# Altium PCB OSHparkTemplate.PcbDoc
Units mm, origin at the board's own origin, x right, y up, seen from the top; angles counter-clockwise.
Board outline 37 x 50 mm, 2 copper layers (Top Layer, Bottom Layer); 30 components, 26 nets, 143 pads, 8 vias.
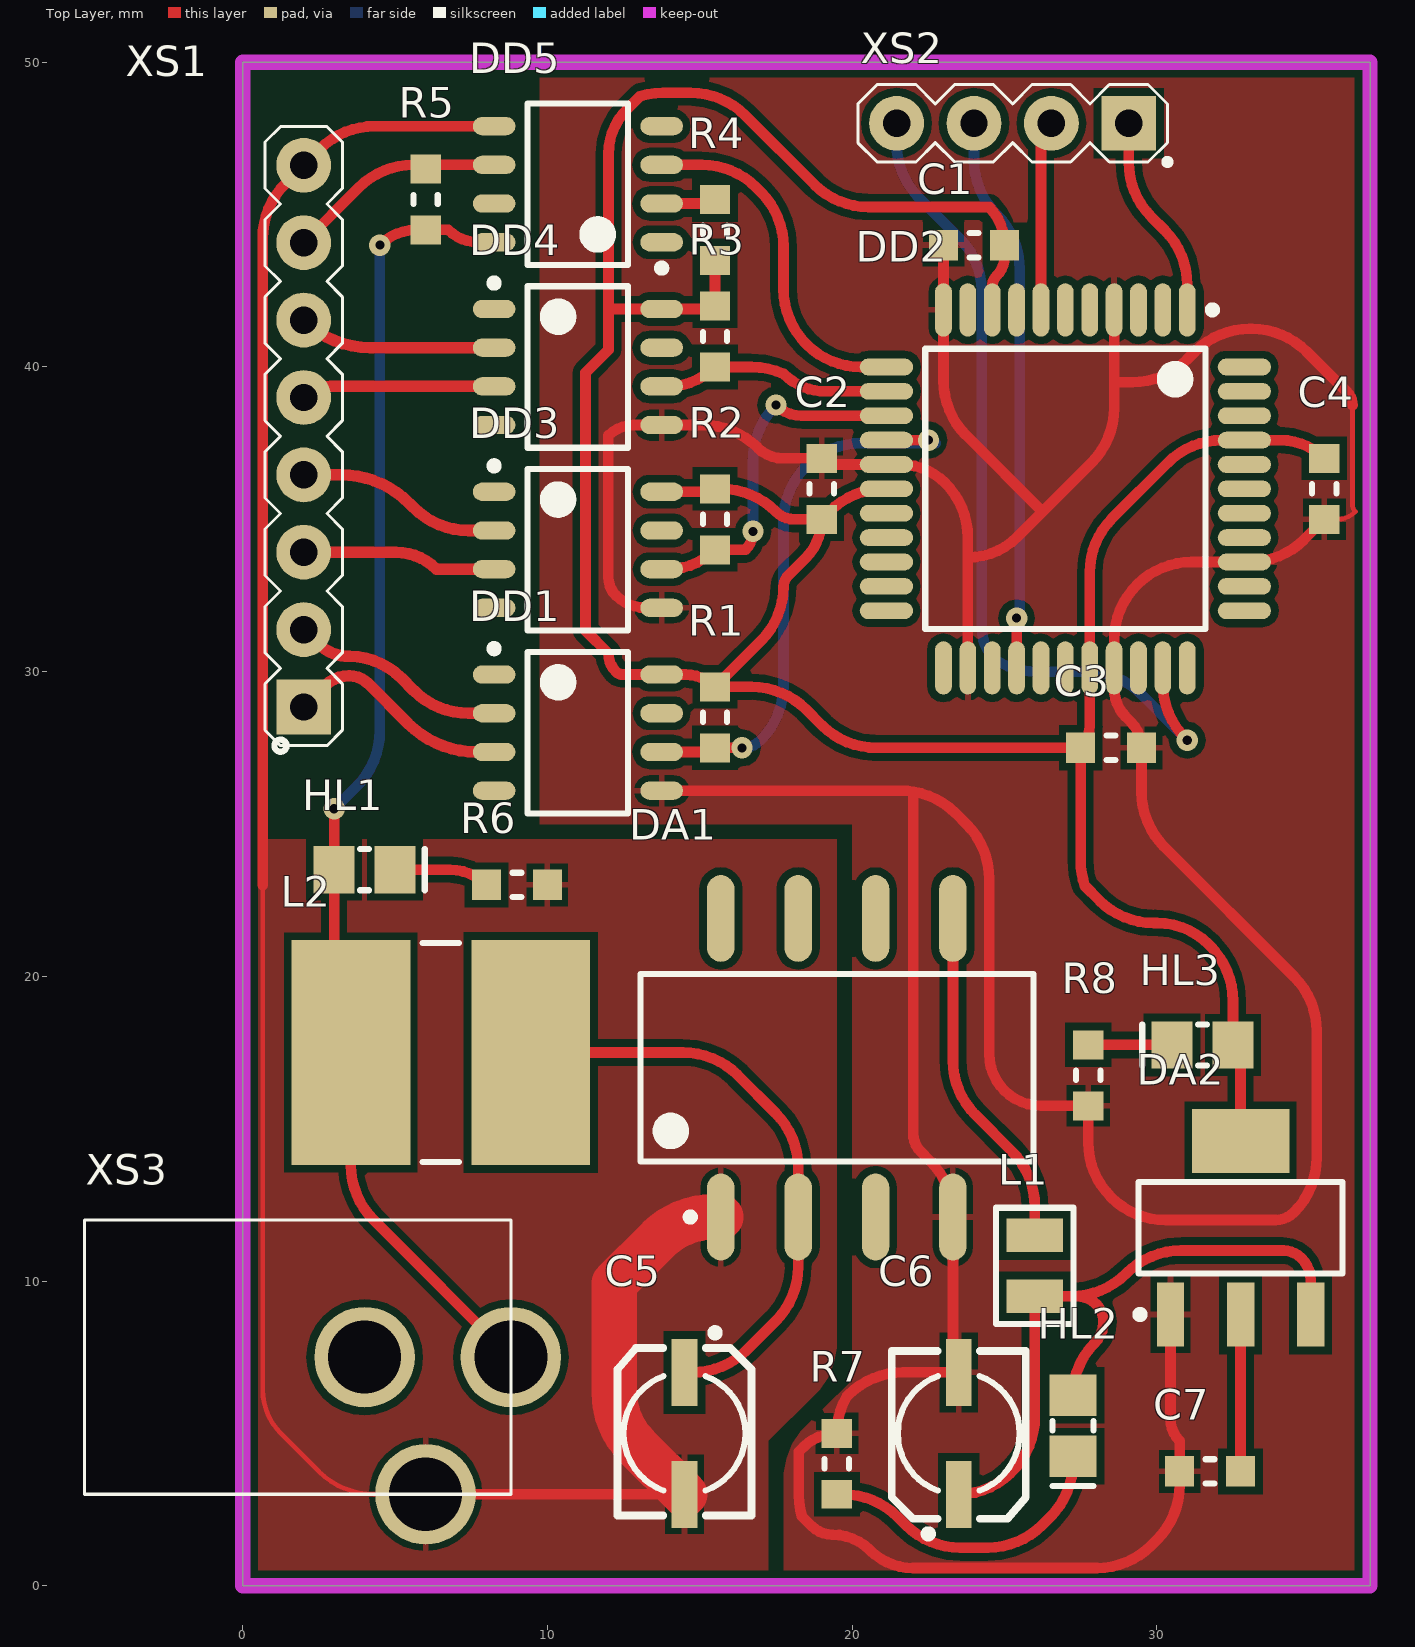
[diagram p0: Top Layer view]
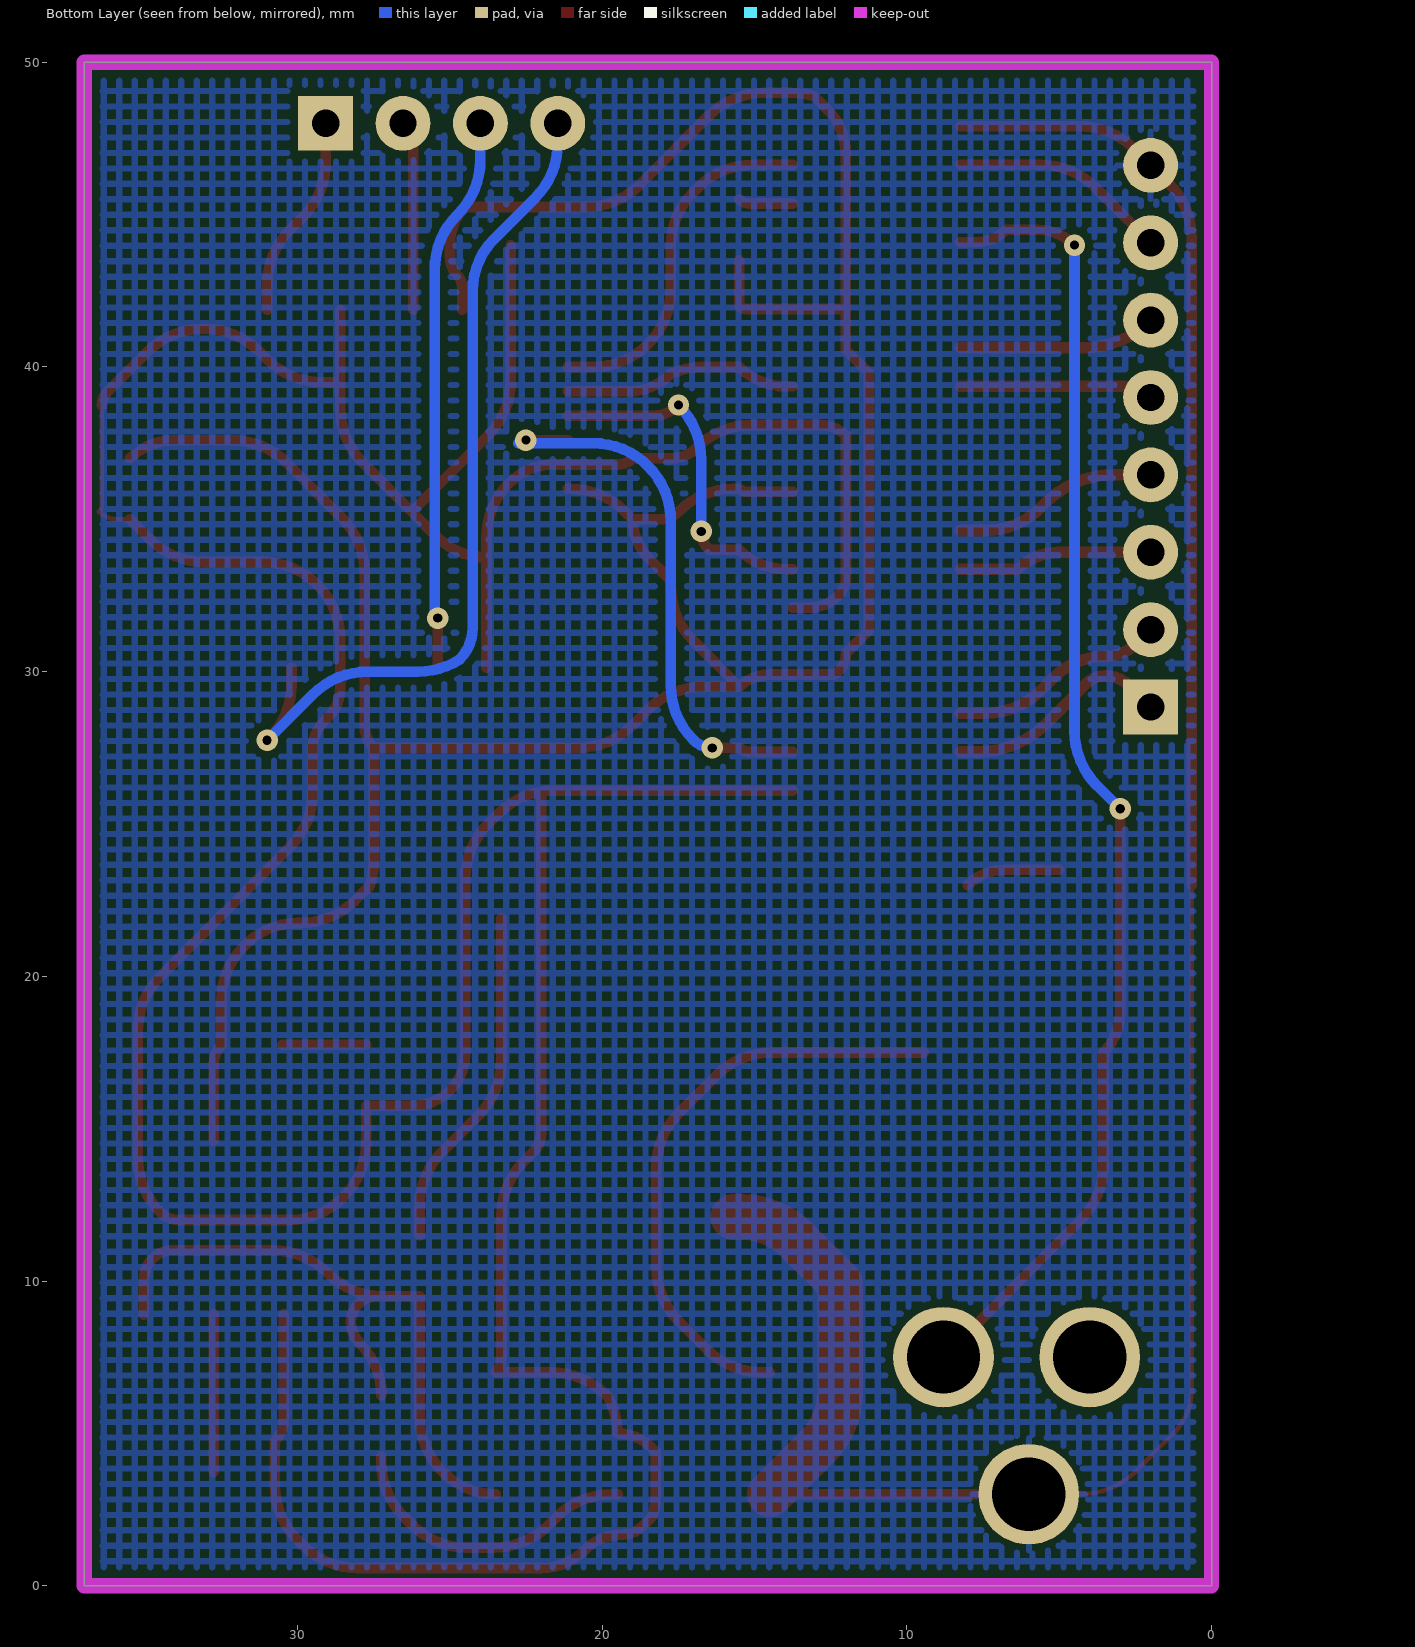
[diagram p1: Bottom Layer view, seen from below]

## Layer stack, top to bottom
Top Solder: solder mask 0.0102, Solder Resist, Dk 3.5
Top Layer: signal copper 0.0356
Dielectric 1: dielectric 0.32, FR-4, Dk 4.8
Bottom Layer: signal copper 0.0356
Bottom Solder: solder mask 0.0102, Solder Resist, Dk 3.5

## Board outline
0,0 0,50 37,50 37,0

## Design rules (kind name [scope] priority, off if disabled: settings)
AcuteAngle [All] p1: minimum=6.00000000000000E+0001 checktracksonly=FALSE
Clearance [All] p1: gap=0.25 ignorepadtopadclearanceinfootprint=FALSE except(0: Arc-Hole Track-Hole SMDPad-Hole THPad-Hole Via-Hole Fill-Hole Poly-Hole Region-Hole Text-Hole; 0.152: Arc-Arc Arc-Track Track-Track)
DiffPairsRouting [All] p1: maxlimit=0.254 minlimit=0.254 mostfreqgap=0.254 toplayer_minwidth=0.381 toplayer_maxwidth=0.381 toplayer_prefwidth=0.381 bottomlayer_minwidth=0.381 bottomlayer_maxwidth=0.381 bottomlayer_prefwidth=0.381 maxuncoupledlength=12.7
HoleSize "HoleSize plated" [PadIsPlated] p1: absolutevalues=TRUE maxlimit=3 minlimit=0.254 maxpercent=80.000 minpercent=20.000
HoleSize "HoleSize not plated" [Not PadIsPlated] p2: absolutevalues=TRUE maxlimit=3 minlimit=0.254 maxpercent=80.000 minpercent=20.000
HoleToHoleClearance [All] p1: gap=0.2 allowstackedmicrovias=TRUE
MinimumAnnularRing AnnularRing_VIA [IsVia] p1: minimumring=0.127
MinimumAnnularRing AnnularRing_PAD [IsPad] p2: minimumring=0.127
MinimumSolderMaskSliver [All] p1: minsoldermaskwidth=0.15
NetAntennae [All] p1: netantennaetolerance=1
PlaneClearance [All] p1: clearance=0.5
PlaneConnect [All] p1: planeconnectstyle=Relief reliefexpansion=0.2 reliefentries=4 reliefconductorwidth=0.2 reliefairgap=0.2
PolygonConnect [All] p1: connectstyle=Relief reliefconductorwidth=0.2 reliefentries=4 polygonreliefangle="90 Angle" airgapwidth=0.2
RoomDefinition main [InComponentClass('main')] p1: confinementstyle=ConfineIn formatcopy=TRUE lockcomponents=FALSE outline 0,-0.05 37.25,-0.05 37.25,50 0,50
RoutingVias [All] p1: holewidth=0.3 width=0.7 viastyle="Through Hole" minholewidth=0.3 minwidth=0.7 maxholewidth=0.3 maxwidth=0.7
SMDNeckDown [All] p1: percent=90.000
SMDToCorner [All] p1: distance=393701
SilkToBoardRegionClearance [All] p1 off:
SilkToSilkClearance [All] p1: silktosilkclearance=0.2
SilkToSolderMaskClearance [IsPad] p1: minsilkscreentomaskgap=0.25 clearancetoexposedcopper=TRUE
SolderMaskExpansion [All] p1: expansion=0.05
Width [All] p1: maxlimit=1.5 minlimit=0.152 preferedwidth=0.35
20 further rules are at their usual default settings.

## Classes and differential pairs
net class QuadratureSignal: QA_N QA_P QB_N QB_P Z_N Z_P
differential pair Z: +Z_P -Z_N
differential pair QB: +QB_P -QB_N
differential pair QA: +QA_P -QA_N

## Components (designator, comment, footprint, x,y, rotation, side; value= is the part's Value field where it differs from the comment)
C1 "100n" SMDRC0603 24,44 r0 top
C2 "100n" SMDRC0603 19,36 r270 top
C3 "100n" SMDRC0603 28.5,27.5 r180 top
C4 "100n" SMDRC0603 35.5,36 r90 top
C5 "10 мк 16 В" CAP_POLAR_ELLYTE_B 14.5,5 r270 top
C6 "10 мк 16 В" CAP_POLAR_ELLYTE_B 23.5,5 r90 top
C7 "100n" SMDRC0603 31.75,3.75 r0 top
DA1 "AM1L-1205S-NZ" SOP254P1120X625-8M 19.5,17 r90 top
DA2 "LD1117A" SOT230P700X180-4L 32.75,11.75 r90 top
DD1 "HCPL-0601" HCPL-1601 11,28 r0 top
DD2 "EPM3064ATC44-10N" TQFP80P1200X1230X120-44N 27,36 r270 top
DD3 "HCPL-0601" HCPL-1601 11,34 r0 top
DD4 "HCPL-0601" HCPL-1601 11,40 r0 top
DD5 "HCPL-0601" HCPL-1601 11,46 r180 top
HL1 "KP-2012SGC" DIOMELF2012M 4,23.5 r0 top
HL2 "KP-2012SGC" DIOMELF2012M 27.25,5.25 r270 top
HL3 "KP-2012SGC" DIOMELF2012M 31.5,17.75 r180 top
L1 "10 мкГн" MLZ2012 26,10.5 r270 top
L2 "330 мкГн" INDP7972X50M 6.5,17.5 r180 top
R1 "1k" SMDRC0603 15.5,28.5 r90 top
R2 "1k" SMDRC0603 15.5,35 r90 top
R3 "1k" SMDRC0603 15.5,41 r90 top
R4 "100" SMDRC0603 15.5,44.5 r270 top
R5 "1k" SMDRC0603 6,45.5 r270 top
R6 "220" SMDRC0603 9,23 r180 top
R7 "220" SMDRC0603 19.5,4 r90 top
R8 "100" SMDRC0603 27.75,16.75 r90 top
XS1 "PLS-08R" PLS-08R1 2,28.84 r90 top
XS2 "PLS-4" PLS-04 29.08,48 r180 top
XS3 "гнездо 5.5*2.1 (3015) 2826" CON2_3015_PowerJack_5.5x2.1 -5.2,12 r270 top

## Footprints (in the part's own frame and the unit in brackets; to place one, negate y for a bottom-side part, rotate by r counter-clockwise, add the part's x,y. Pads: shape width x height; smd on the part's side, far side on the other; paste and mask are expansions set on the pad)
CAP_POLAR_ELLYTE_B [mm] "Surface Mount Aluminum Electrolytic (size code B)"
  rect 2.2x0.85 smd: 1(2,0) 2(-2,0)
  silkscreen extent -3.42,-2.2 2.7,2.2, body extent -2.3,-2.15 2.3,2.15, height 5.41
CON2_3015_PowerJack_5.5x2.1 [mm] "Power_Con"
  round 3.3 hole 2.4: 1(4.5,14) 2(9,11.2) 3(4.5,9.2)
  silkscreen extent 0,0 9,14, body extent -0.5,-0.1 9.48,14, height 10.96
DIOMELF2012M [mm] "MELF Diode, 2-Leads, Body 2,00x1,20mm, IPC Low Density"
  rect 1.35x1.55 smd: 1(-1,0) 2(1,0)
  silkscreen extent -0.15,-0.67 1.97,0.67, body extent -1,-0.6 1,0.6, height 1.2
HCPL-1601 [mm] "SOIC, 8-Leads, Body 5,21x3,94mm, Pitch 1,27mm, IPC Medium Density"
  oval 1.4x0.6 smd: 1(-2.75,1.905) 2(-2.75,0.635) 3(-2.75,-0.635) 4(-2.75,-1.905) 5(2.75,-1.905) 6(2.75,-0.635) 7(2.75,0.635) 8(2.75,1.905)
  silkscreen extent -2.87,-2.65 1.65,2.88, body extent -3,-2.65 3,2.65, height 3.3
INDP7972X50M [mm] "Precision Wire Wound Inductor, 2-Leads, Body 7,90x7,20mm, IPC Low Density"
  rect 3.9x7.4 smd: 1(-2.95,0) 2(2.95,0)
  silkscreen extent -0.6,-3.6 0.6,3.6, body extent -3.95,-3.6 3.95,3.6, height 5
MLZ2012 [mm]
  rect 1.1x1.85 smd: 1(-1,0) 2(1,0)
  silkscreen extent -1.91,-1.27 1.91,1.27, body extent -1,-0.6 1,0.6, height 1.3
PLS-04 [mm] "вилка на плату"
  rect 1.8x1.8 hole 0.9: 1(0,0)
  round 1.8 hole 0.9: 2(2.54,0) 3(5.08,0) 4(7.62,0)
  silkscreen extent -1.37,-1.27 8.89,1.37, body extent -1.27,-1.25 8.89,1.25, height 8.6
PLS-08R1 [mm] "угловая вилка на плату"
  rect 1.8x1.8 hole 0.9: 1(0,0)
  round 1.8 hole 0.9: 2(2.54,0) 3(5.08,0) 4(7.62,0) 5(10.16,0) 6(12.7,0) 7(15.24,0) 8(17.78,0)
  silkscreen extent -1.47,-1.27 19.05,1.27, body extent -1.28,-1.25 19.05,6, height 6.1
SMDRC0603 [mm] "Chip Resistor, 2-Leads, Body 1,60x0,80mm, IPC Low Density"
  rect 0.95x1 smd: 1(-1,0) 2(1,0)
  silkscreen extent -0.15,-0.4 0.15,0.4, body extent -0.8,-0.4 0.8,0.4, height 0.45
SOP254P1120X625-8M [mm] "SOP, 8-Leads, Body 12,70x7,25mm, Pitch 2,54mm, IPC Low Density"
  oval 2.85x0.9 smd: 1(-4.9,3.81) 2(-4.9,1.27) 3(-4.9,-1.27) 4(-4.9,-3.81) 5(4.9,-3.81) 6(4.9,-1.27) 7(4.9,1.27) 8(4.9,3.81)
  silkscreen extent -5.02,-6.45 3.08,6.45, body extent -3.75,-6.45 3.75,6.45, height 6.25
SOT230P700X180-4L [mm] "SOT223, 4-Leads, Body 6,50x7,00mm (avg), Pitch 2,30mm, IPC High Density"
  rect 2.1x0.9 smd: 1(-2.85,2.3) 2(-2.85,0) 3(-2.85,-2.3)
  rect 2.1x3.2 smd: 4(2.85,0)
  silkscreen extent -2.97,-3.35 1.5,3.42, body extent -1.85,-3.35 1.85,3.35, height 1.8
TQFP80P1200X1230X120-44N [mm] "TQFP, 44-Leads, Body 10,00x10,00mm, Pitch 0,80mm, IPC Medium Density"
  oval 1.75x0.55 smd: 1(-5.875,4) 2(-5.875,3.2) 3(-5.875,2.4) 4(-5.875,1.6) 5(-5.875,0.8) 6(-5.875,0) 7(-5.875,-0.8) 8(-5.875,-1.6) 9(-5.875,-2.4) 10(-5.875,-3.2) 11(-5.875,-4) 23(5.875,-4) 24(5.875,-3.2) 25(5.875,-2.4) 26(5.875,-1.6) 27(5.875,-0.8) 28(5.875,0) 29(5.875,0.8) 30(5.875,1.6) 31(5.875,2.4) 32(5.875,3.2) 33(5.875,4)
  oval 0.55x1.75 smd: 12(-4,-5.875) 13(-3.2,-5.875) 14(-2.4,-5.875) 15(-1.6,-5.875) 16(-0.8,-5.875) 17(0,-5.875) 18(0.8,-5.875) 19(1.6,-5.875) 20(2.4,-5.875) 21(3.2,-5.875) 22(4,-5.875) 34(4,5.875) 35(3.2,5.875) 36(2.4,5.875) 37(1.6,5.875) 38(0.8,5.875) 39(0,5.875) 40(-0.8,5.875) 41(-1.6,5.875) 42(-2.4,5.875) 43(-3.2,5.875) 44(-4,5.875)
  silkscreen extent -6,-4.6 4.6,4.95, body extent -6,-6.15 6,6.15, height 1.2

## Part data
C1 C2 C3 C4 C7: library part "Capacitor 0603 100n", "Generic capasitor non-polar", Package=0603, ComponentLink1Description=Datasheet, PartNumber="Capacitor 0603 100n"
C5 C6: library part 10000_016, "10uF 16V Polar SMD cap", Manufacturer=YAGEO, ManufacturerPartNumber=CA016M0010REB-0405, Package=штырьевой, ComponentLink1Description=Datasheet, ComponentLink2Description=Datasheet-local, Price=3,03, Supplier=-
DA1: "DC/DC Isolation", Manufacturer=AIMTEC, Package=SMD-8, ComponentLink1Description=Datasheet, ComponentLink1URL=http://www.aimtec.com/site/Aimtec/files/Datasheet/HighResolution/AM1L-N-Z.pdf, ManufacturerPartNumber=AM1L-1205S-NZ, Price=166,68, Supplier=Диджитек
DA2: library part LD1117AS33TR, "LDO регулятор напряжения 3.3V 1.0A Positive", Manufacturer=STMicroelectronics, ComponentLink1Description=http://www.mouser.com/ds/2/389/CD00002116-250310.pdf, ComponentLink1URL=http://www.mouser.com/ds/2/389/CD00002116-250310.pdf, ManufacturerPartNumber=LD1117AS33TR, Price=45
DD1 DD3 DD4 DD5: library part HCPL-0601-500E, "OPTOISO 3.75KV OPN COLLECTOR 8SO", Case/Package=SOIC, Forward Current=50mA, Forward Voltage=1.75V, Input Current=15mA, Isolation Voltage=3.75kV, Manufacturer="Fairchild Semiconductor", Max Operating Temperature=85°C, Max Output Voltage=7V, Max Power Dissipation=85mW, Min Operating Temperature=-40°C, Package Quantity=3000, Reverse Breakdown Voltage=5V, Supplier Part Number 1=512-HCPL0601, ComponentLink1Description=https://datasheet.ciiva.com/4698/hcpl0601-185320-4698727.pdf, ComponentLink1URL=https://datasheet.ciiva.com/4698/hcpl0601-185320-4698727.pdf, ComponentLink2Description=https://datasheet.ciiva.com/11772/0900766b80d1f17b-11772100.pdf, ComponentLink2URL=https://datasheet.ciiva.com/11772/0900766b80d1f17b-11772100.pdf, ComponentLink3Description=https://datasheet.ciiva.com/26912/hcpl0601-26912362.pdf, ComponentLink3URL=https://datasheet.ciiva.com/26912/hcpl0601-26912362.pdf, ComponentLink4Description=https://datasheet.ciiva.com/2083/hcpl0611-2083487.pdf, ComponentLink4URL=https://datasheet.ciiva.com/2083/hcpl0611-2083487.pdf, ComponentLink5Description=https://datasheet.ciiva.com/26162/hcpl0611-26162959.pdf, ComponentLink5URL=https://datasheet.ciiva.com/26162/hcpl0611-26162959.pdf, ComponentLink6Description=https://datasheet.ciiva.com/26910/getdatasheetpartid-81668-26910220.pdf, ComponentLink6URL=https://datasheet.ciiva.com/26910/getdatasheetpartid-81668-26910220.pdf, ComponentLink7Description=https://datasheet.ciiva.com/8074/1796808-8074123.pdf, ComponentLink7URL=https://datasheet.ciiva.com/8074/1796808-8074123.pdf, ComponentLink8Description=https://datasheet.ciiva.com/8100/hcpl0611-8100123.pdf, ComponentLink8URL=https://datasheet.ciiva.com/8100/hcpl0611-8100123.pdf, Data Rate=10Mbps, Direction=Unidirectional, Fall Time=12ns, Height=3.43mm, Lead Free="Lead Free", Length=5.13mm, ManufacturerPartNumber=HCPL-0601, Max Input Current=15mA, Max Output Current=50mA, Mount="Surface Mount", Number of Channels=1, Number of Elements=1, Number of Pins=8, Output Current=50mA, Output Current per Channel=50mA, Output Voltage=7V, Packaging=Rail/Tube, Polarity=Inverting, Power Dissipation=85mW, Pricing 1="1=2.35, 10=2, 100=1.6, 500=1.4, 1000=1.16, 3000=1.07, 6000=1.03, 9000=0.958 (USD)", Propagation Delay=75ns, Radiation Hardening=No, REACH SVHC="No SVHC", Reverse Voltage (DC)=5V, Rise Time=50ns, Stock 1=5013, Supplier 1=Mouser, Turn-On Delay Time=75ns, Weight=0.252g, Width=4.16mm
DD2: library part EPM3064ATC44, "MAX 3000A, 64 MACROCELLS", Case/Package=TQFP, Frequency=125MHz, Manufacturer=Altera, Max Frequency=222.2MHz, Max Operating Temperature=70°C, Max Supply Voltage=3.6V, Min Operating Temperature=0°C, Min Supply Voltage=3V, Operating Supply Voltage=3.3V, Package Quantity=160, Supplier Part Number 1=544-1977-ND, ComponentLink1Description=https://datasheet.ciiva.com/1407/m3000a-1407040.pdf, ComponentLink1URL=https://datasheet.ciiva.com/1407/m3000a-1407040.pdf, ComponentLink2Description=https://datasheet.ciiva.com/1152/134639-1152985.pdf, ComponentLink2URL=https://datasheet.ciiva.com/1152/134639-1152985.pdf, ComponentLink3Description=https://datasheet.ciiva.com/25922/m3000a-25922153.pdf, ComponentLink3URL=https://datasheet.ciiva.com/25922/m3000a-25922153.pdf, ComponentLink4Description=https://datasheet.ciiva.com/5702/m3000a-5702171.pdf, ComponentLink4URL=https://datasheet.ciiva.com/5702/m3000a-5702171.pdf, ComponentLink5Description=https://datasheet.ciiva.com/1152/134639-1152983.pdf, ComponentLink5URL=https://datasheet.ciiva.com/1152/134639-1152983.pdf, ComponentLink6Description=https://datasheet.ciiva.com/1161/m3000a-1161336.pdf, ComponentLink6URL=https://datasheet.ciiva.com/1161/m3000a-1161336.pdf, ComponentLink7Description=https://datasheet.ciiva.com/5702/m3000a-5702168.pdf, ComponentLink7URL=https://datasheet.ciiva.com/5702/m3000a-5702168.pdf, Height=0.95mm, Lead Free="Lead Free", Length=10mm, ManufacturerPartNumber=EPM3064ATC44-10N, Memory Type=EEPROM, Mount="Surface Mount", Number of Gates=1250, Number of I/Os=34, Number of Inputs=34, Number of Logic Blocks (LABs)=4, Number of Logic Elements/Cells=4, Number of Macrocells=64, Number of Pins=44, Number of Programmable I/O=34, Packaging=Tray, Pricing 1="1=2.93 (USD)", Propagation Delay=10ns, Radiation Hardening=No, REACH SVHC=Unknown, Speed Grade=10, Stock 1=1163, Supplier 1=Digi-Key, Termination=SMD/SMT, Turn-On Delay Time=10ns, Width=10mm
HL1 HL2 HL3: library part LED1_G, "Diod LED SMD Green", Color=Green, ComponentLink1Description=Datasheet, ComponentLink2Description=Datasheet-local, ManufacturerPartNumber=KP-2012SGC, Price=2,88
L1: library part MLZ2012N100LT, "Катушка 500mA 10мкГн", Manufacturer=TDK, ManufacturerPartNumber=MPZ1608S181A, Package=2012, ComponentLink1Description=Datasheet, ComponentLink1URL=http://www.mouser.com/ds/2/400/inductor_commercial_decoupling_mlz_en-348849.pdf, ComponentLink2Description=Datasheet-local, Supplier=Промэлектроника
L2: library part SCD0705T-331K-N, "Inductor", ComponentLink1Description=Datasheet, ComponentLink1URL=http://download.siliconexpert.com/pdfs/2010/12/8/6/47/4/732/yageo_/manual/inductors_smdpower_scd_2010.pdf, ComponentLink2Description=Datasheet-local, ManufacturerPartNumber=SCD0705T-331K-N
R1 R2 R3 R5: library part "Resistor 0603 1k", "Generic resistor", Package=0603, ComponentLink1Description=Datasheet, ComponentLink1URL=http://www.mouser.com/ds/2/447/PYu-RC0402_51_RoHS_L_6_r-8721.pdf, PartNumber="Resistor 0603 1k"
R4 R8: library part "Resistor 0603 100", "Generic resistor", Package=0603, ComponentLink1Description=Datasheet, ComponentLink1URL=http://www.mouser.com/ds/2/447/PYu-RC0402_51_RoHS_L_6_r-8721.pdf, PartNumber="Resistor 0603 100"
R6 R7: library part "Resistor 0603 220", "Generic resistor", Package=0603, ComponentLink1Description=Datasheet, ComponentLink1URL=http://www.mouser.com/ds/2/447/PYu-RC0402_51_RoHS_L_6_r-8721.pdf, PartNumber="Resistor 0603 220"
XS1: library part "Con8_M PLS-08MR", "Male 8-pin connection", ComponentLink1Description=Datasheet, ComponentLink1URL=http://www.promelec.ru/catalog/406/1218/1223/1/99528/, ComponentLink2Description=Datasheet-local, ManufacturerPartNumber=PLS-08R, Price=1
XS2: library part Con4_M_PLS-4, "Male 4-pin connection", ComponentLink1Description=Datasheet, ComponentLink1URL=http://www.promelec.ru/catalog/406/1218/1224/1/24233/, ComponentLink2Description=Datasheet-local, ManufacturerPartNumber=PLS-4, Price=1
XS3: library part Con2_F_PowerJack_3015, "гнездо 5.5*2.1", Manufacturer=Unknown, ManufacturerPartNumber="гнездо 5.5*2.1 (3015) 2826", Price=16.77, Supplier=Промэлектроника

## Via types
v1: diameter 0.7, hole 0.3, Top Layer to Bottom Layer, 8 vias

## Nets (pads, with @x,y where several pads share a name; then routed paths per layer and width w, separated by ;. In a path a pad name is that pad's centre, name@x,y a point inside that pad or via, vN(x,y) a via of type N, cw(c..) or ccw(c..) an arc to the next point about the centre after c; other vN are vias at no path point)
+3V_INT: C1.2 C2.2 C3.2 C4.2 C7.2 DA2.2 DA2.4 DD1.8 DD2.9 DD2.17 DD2.29 DD2.41 DD3.8 DD4.8 HL3.1 R1.2 R2.2 R3.2 R4.2 | length 109.1
  Top Layer w0.35: DD3.8 15.271,35.905 ccw(c15.271,36.229) R2.2 15.698,36 cw(c15.698,33.46) 17.494,35.256 ccw(c18.112,35.874) 18.112,35 C2.2 ; R4.2 R3.2 cw(c15.271,42.229) 15.271,41.905 DD4.8 12.235,41.905 cw(c12.235,42.229) 12.006,42 ; DD2.17 21.052,36 ccw(c21.052,33.46) 19.256,35.256 C2.2 ; DD2.9 24.6,42.638 cw(c25.112,42.638) 24.75,43 ccw(c24.146,43.604) 25,43.604 C1.2 25,44.043 ccw(c23.293,44.043) 24.5,45.25 20.552,45.25 cw(c20.552,47.79) 18.756,45.994 16.494,48.256 ccw(c14.698,46.46) 14.698,49 13.802,49 ccw(c13.802,46.46) 13.037,48.882 12.608,48.453 ccw(c14.06,47) 12.006,47 12.006,42 ; C7.2 DA2.2 ; DA2.4 32.75,17.146 ccw(c31.896,17.146) HL3.1 32.5,19.198 ccw(c29.96,19.198) 31.756,20.994 31.707,21.043 ccw(c30,19.336) 30,21.75 29.907,21.75 cw(c29.907,24.29) 28.111,22.494 27.643,22.962 cw(c30.04,23.802) 27.5,23.802 C3.2 ; C4.2 ccw(c34.051,35.551) 34.051,37.6 DD2.41 32.152,37.6 ccw(c32.152,35.06) 30.356,36.856 28.544,35.044 ccw(c30.34,33.248) 27.8,33.248 DD2.29 27.8,28.224 cw(c26.776,28.224) C3.2 ; 12.006,42 12.006,40.571 11.25,39.815 11.25,31.354 12,30.604 ccw(c12.854,30.604) 12.25,30 ccw(c12.479,30.229) 12.479,29.905 DD1.8 14.522,29.905 cw(c14.522,28.522) R1.2 ; R1.2 17.006,31.006 ccw(c15.21,32.802) 17.75,32.802 cw(c18.228,32.802) 17.89,33.14 18.47,33.72 ccw(c17.189,35) C2.2 ; R1.2 16.698,29.5 cw(c16.698,26.96) 18.494,28.756 19.006,28.244 ccw(c20.802,30.04) 20.802,27.5 C3.2
+5V_EXT: DD5.8 HL1.1 L2.2 R5.2 XS3.1 | length 43.2
  Top Layer w0.35: v1(3,25.5) HL1.1 3,18.828 ccw(c4.878,18.828) L2.2 3.55,13.802 ccw(c6.09,13.802) 4.294,12.006 XS3.1 ; v1(4.5,44) cw(c5.707,42.793) 5.707,44.5 R5.2 6.75,44.5 ccw(c7.728,45.478) 7.728,44.095 DD5.8
  Bottom Layer w0.35: v1(3,25.5) 3.756,26.256 ccw(c1.96,28.052) 4.5,28.052 v1(4.5,44)
+5V_INT: C6.2 DA2.3 HL2.1 L1.2 | length 23.3
  Top Layer w0.35: C6.2 ccw(c23.5,5.414) 25.207,3.707 25.256,3.756 ccw(c23.46,5.552) 26,5.552 L1.2 27.198,9.5 ; HL2.1 cw(c29.664,6.25) 27.75,7.721 cw(c29.664,6.25) 27.957,7.957 ccw(c27.25,8.664) 28.25,8.664 ccw(c27.439,8.664) 28.013,9.237 ccw(c27.379,8.604) 27.379,9.5 27.198,9.5 ; DA2.3 35.05,10.026 ccw(c34.026,10.026) 34.75,10.75 ccw(c34.146,10.146) 34.146,11 30.802,11 ccw(c30.802,8.46) 29.006,10.256 28.994,10.244 cw(c27.198,12.04) 27.198,9.5
GND: C1.1 C2.1 C3.1 C4.1 C6.1 C7.1 DA1.4 DA2.1 DD1.5 DD2.4 DD2.11 DD2.16 DD2.24 DD2.30 DD2.36 DD3.5 DD4.5 R7.2 R8.1 | length 169.7
  Top Layer w0.152: C4.1 35.918,35 ccw(c35.918,35.854) 36.521,35.25 cw(c36.76,35.489) 36.423,35.489 36.423,38.75
  Top Layer w0.35: DD1.5 21.603,26.095 cw(c21.603,23.555) 22.01,26.062 ; DD3.5 13.228,32.095 cw(c13.228,33.478) 12.25,32.5 cw(c12.854,33.104) 12,33.104 12,37.75 cw(c12.833,36.917) 12.833,38.095 DD4.5 15.103,38.095 cw(c15.103,35.555) 16.899,37.351 ccw(c17.746,38.199) 17.746,37 C2.1 ccw(c19.483,37.483) 19.483,36.8 DD2.16 21.593,36.8 cw(c21.593,34.731) 23.056,36.194 cw(c21.26,34.398) 23.8,34.398 23.8,33.75 ; C1.1 DD2.11 23,39.552 ccw(c25.54,39.552) 23.744,37.756 26.25,35.25 ; DD2.24 23.8,33.75 ; DD2.4 28.6,39.5 ; DA2.1 30.45,5.474 ccw(c31.474,5.474) 30.75,4.75 C7.1 30.75,3.302 cw(c28.21,3.302) 30.006,1.506 29.821,1.321 cw(c28.025,3.117) 28.025,0.577 22,0.577 cw(c22,2.575) 20.588,1.162 ccw(c19.349,-0.076) 19.349,1.676 cw(c19.349,2.621) 18.68,1.953 18.352,2.281 cw(c20.567,2.96) 18.25,2.96 18.25,4.396 18.396,4.543 cw(c19.5,3.439) R7.2 cw(c21.914,5) 19.824,6.207 19.872,6.256 cw(c21.668,4.46) 21.668,7 C6.1 cw(c23.959,7.459) 23.31,7.459 DA1.4 23.31,12.138 ccw(c20.77,12.138) 22.566,13.934 22.25,14.25 cw(c22.839,14.839) 22.006,14.839 22.006,26.058 22.01,26.062 ; C4.1 34.844,34.344 cw(c33.048,36.14) 33.048,33.6 DD2.36 31.152,33.6 ccw(c31.152,31.06) 29.356,32.856 29.344,32.844 ccw(c31.14,31.048) 28.6,31.048 DD2.30 28.6,29.466 ccw(c29.966,29.466) 29,28.5 29.146,28.354 cw(c28.293,27.5) C3.1 29.5,26.052 ccw(c32.04,26.052) 30.244,24.256 34.506,19.994 cw(c32.71,18.198) 35.25,18.198 35.25,14.052 cw(c32.71,14.052) 34.506,12.256 cw(c33.888,12.874) 33.888,12 30.302,12 cw(c30.302,14.54) 28.506,12.744 28.494,12.756 cw(c30.29,14.552) 27.75,14.552 R8.1 26.207,15.75 cw(c26.207,17.457) 25,16.25 cw(c26.207,17.457) 24.5,17.457 24.5,23.198 ccw(c21.96,23.198) 23.756,24.994 23.399,25.351 ccw(c21.603,23.555) 22.01,26.062 ; 36.423,38.75 ccw(c35.819,38.75) 36.246,39.177 34.917,40.506 ccw(c33.12,38.71) 33.12,41.25 33.052,41.25 ccw(c33.052,38.71) 31.256,40.506 30.994,40.244 cw(c29.198,42.04) 29.198,39.5 28.6,39.5 ; 23.8,33.75 ccw(c23.8,36.044) 25.422,34.422 26.25,35.25 ; 26.25,35.25 27.856,36.856 ccw(c26.06,38.652) 28.6,38.652 28.6,39.5
GND_EXT: C5.1 DA1.1 DD5.5 R6.1 XS1.8 XS3.2 | length 74.9
  Top Layer w0.152: 0.652,23 0.652,6.443 ccw(c2.693,6.443) 1.25,5 2.506,3.744 ccw(c4.302,5.54) 4.302,3 XS3.2
  Top Layer w0.35: 0.652,23 0.652,44.22 cw(c3.192,44.22) 1.396,46.016 XS1.8 2.541,47.161 cw(c4.337,45.365) 4.337,47.905 DD5.5 ; XS3.2 C5.1
  Top Layer w1.5: C5.1 12.937,4.563 cw(c14.733,6.359) 12.193,6.359 12.193,9.92 13.629,11.356 cw(c15.426,9.56) 15.426,12.1 DA1.1
NetC5_2: C5.2 DA1.2 L2.1 | length 19.6
  Top Layer w0.35: L2.1 14.448,17.5 cw(c14.448,14.96) 16.244,16.756 17.486,15.514 cw(c15.69,13.718) 18.23,13.718 DA1.2 18.23,10.473 cw(c15.69,10.473) 17.911,9.24 cw(c15.69,10.473) 17.486,8.677 16.553,7.744 cw(c14.757,9.54) 14.757,7 C5.2
NetDA1_5: DA1.5 L1.1 | length 11.3
  Top Layer w0.35: DA1.5 23.31,17.242 ccw(c25.85,17.242) 24.054,15.446 25.256,14.244 cw(c23.46,12.448) 26,12.448 L1.1
NetDD2_1: DD2.1 XS2.1 | length 6.7
  Top Layer w0.35: XS2.1 29.08,46.722 ccw(c31.62,46.722) 29.824,44.926 30.256,44.494 cw(c28.46,42.698) 31,42.698 DD2.1
NetDD2_7: DD2.7 XS2.2 | length 6.2
  Top Layer w0.35: DD2.7 26.2,47.179 cw(c27.361,47.179) XS2.2
NetDD2_26: DD2.26 XS2.3 | length 18.3
  Top Layer w0.35: DD2.26 v1(25.4,31.759)
  Bottom Layer w0.35: XS2.3 24,46.802 ccw(c26.54,46.802) 24.744,45.006 24.756,44.994 cw(c22.96,43.198) 25.5,43.198 25.5,32 ccw(c25.741,31.759) v1(25.4,31.759)
NetDD2_32: DD2.32 XS2.4 | length 28.5
  Top Layer w0.35: DD2.32 30.2,29.602 ccw(c32.74,29.602) 30.944,27.806 v1(31,27.75)
  Bottom Layer w0.35: XS2.4 21.46,47.342 ccw(c24,47.342) 22.204,45.546 23.549,44.201 cw(c21.842,42.494) 24.256,42.494 24.256,31.436 ccw(c25.722,31.436) 24.686,30.399 ccw(c26.052,32.54) 26.052,30 27.698,30 cw(c27.698,27.46) 29.494,29.256 v1(31,27.75)
NetDD5_2: DD5.2 R4.1 | length 1.8
  Top Layer w0.35: DD5.2 15.174,45.365 ccw(c15.174,45.826) R4.1
NetHL1_2: HL1.2 R6.2 | length 3.1
  Top Layer w0.35: HL1.2 6.793,23.5 cw(c6.793,21.793) R6.2
NetHL2_2: HL2.2 R7.1 | length 10
  Top Layer w0.35: R7.1 19.698,3 cw(c19.698,0.46) 21.494,2.256 21.756,1.994 ccw(c23.552,3.79) 23.552,1.25 24.448,1.25 ccw(c24.448,3.79) 26.244,1.994 26.506,2.256 ccw(c24.71,4.052) 27.25,4.052 HL2.2
NetHL3_2: HL3.2 R8.2 | length 2.7
  Top Layer w0.35: R8.2 HL3.2
out: DD5.6 R5.1 XS1.7 | length 7.2
  Top Layer w0.35: XS1.7 3.811,45.891 cw(c5.607,44.095) 5.607,46.635 DD5.6
out_cpld: DD2.12 DD5.3 | length 11.7
  Top Layer w0.35: DD5.3 15.063,46.635 cw(c15.063,44.095) 16.859,45.891 17.006,45.744 cw(c15.21,43.948) 17.75,43.948 17.75,42.552 ccw(c20.29,42.552) 18.494,40.756 18.506,40.744 ccw(c20.302,42.54) 20.302,40 DD2.12
qa_cpld: DD2.13 DD4.6 R3.1 | length 7.7
  Top Layer w0.35: DD4.6 13.967,39.365 ccw(c13.967,41.533) R3.1 16.698,40 cw(c16.698,37.46) 17.758,39.768 ccw(c19.13,41.139) 18.406,39.34 ccw(c19.13,41.139) 19.13,39.2 DD2.13
QA_N: DD4.3 XS1.5 | length 6.3
  Top Layer w0.381: XS1.5 cw(c2.881,38.119) 2.881,39.365 DD4.3
QA_P: DD4.2 XS1.6 | length 6.5
  Top Layer w0.381: XS1.6 ccw(c4.185,43.725) 4.185,40.635 DD4.2
qb_cpld: DD2.14 DD3.6 R2.1 | length 11.7
  Top Layer w0.35: DD3.6 13.967,33.365 ccw(c13.967,35.533) R2.1 16.5,34 ccw(c15.896,34.604) v1(16.75,34.604) ; v1(17.5,38.75) ccw(c18.345,39.595) 18.345,38.4 DD2.14
  Bottom Layer w0.35: v1(16.75,34.604) 16.75,36.948 cw(c19.29,36.948) 17.494,38.744 v1(17.5,38.75)
QB_N: DD3.3 XS1.3 | length 6.4
  Top Layer w0.381: XS1.3 5.02,33.92 cw(c5.02,32.025) 6.36,33.365 DD3.3
QB_P: DD3.2 XS1.4 | length 6.8
  Top Layer w0.381: XS1.4 3.219,36.46 cw(c3.219,33.285) 5.464,35.53 5.616,35.379 ccw(c7.412,37.175) 7.412,34.635 DD3.2
z_cpld: DD1.6 DD2.15 R1.1 | length 18.9
  Top Layer w0.35: DD1.6 15.174,27.365 ccw(c15.174,27.826) R1.1 v1(16.388,27.5) ; DD2.15 v1(22.509,37.6)
  Bottom Layer w0.35: v1(16.388,27.5) ccw(c16.388,28.374) 17.006,27.756 ccw(c15.21,29.552) 17.75,29.552 17.75,34.948 cw(c20.29,34.948) 18.494,36.744 18.506,36.756 cw(c20.302,34.96) 20.302,37.5 22.75,37.5 ccw(c22.509,37.259) v1(22.509,37.6)
Z_N: DD1.3 XS1.1 | length 7.5
  Top Layer w0.381: XS1.1 2.689,29.529 cw(c3.5,28.718) 3.5,29.865 cw(c3.5,28.997) 4.114,29.611 5.43,28.295 ccw(c7.675,30.54) 7.675,27.365 DD1.3
Z_P: DD1.2 XS1.2 | length 7.1
  Top Layer w0.381: XS1.2 2.442,30.938 ccw(c3.5,31.997) 3.224,30.526 ccw(c3.5,31.997) 3.5,30.5 cw(c3.5,28.099) 5.198,29.797 5.616,29.379 ccw(c7.412,31.175) 7.412,28.635 DD1.2
pads on no net: DA1.3 DA1.6 DA1.7 DA1.8 DD1.1 DD1.4 DD1.7 DD2.2 DD2.3 DD2.5 DD2.6 DD2.8 DD2.10 DD2.18 DD2.19 DD2.20 DD2.21 DD2.22 DD2.23 DD2.25 DD2.27 DD2.28 DD2.31 DD2.33 DD2.34 DD2.35 DD2.37 DD2.38 DD2.39 DD2.40 DD2.42 DD2.43 DD2.44 DD3.1 DD3.4 DD3.7 DD4.1 DD4.4 DD4.7 DD5.1 DD5.4 DD5.7 XS3.3

## Polygon pours and split planes (outlines as drawn)
GND on Top Layer "g" (solid, remove dead copper, pour order 4): 17.75,0 17.75,3.448 cw(c20.29,3.448) 18.494,5.244 20,6.75 20,25 9.75,25 9.75,50 37,50 37,0
GND_EXT on Top Layer "ext_g" (solid, remove dead copper, pour order 2): 0,-0.05 0,24.5 19.5,24.5 19.5,8.052 cw(c16.96,8.052) 18.756,6.256 17.25,4.75 17.25,0.25
GND_EXT on Bottom Layer "g_b" (hatched 90Degree grid 0.508 track 0.203, remove dead copper, pour order 10): 37,50 37,0 0,0 0,50

## Keep-outs
Keep-Out Layer:
  the board outline again, w0.5